# EAGLE board Layout_SMD (EAGLE 7.2.0)
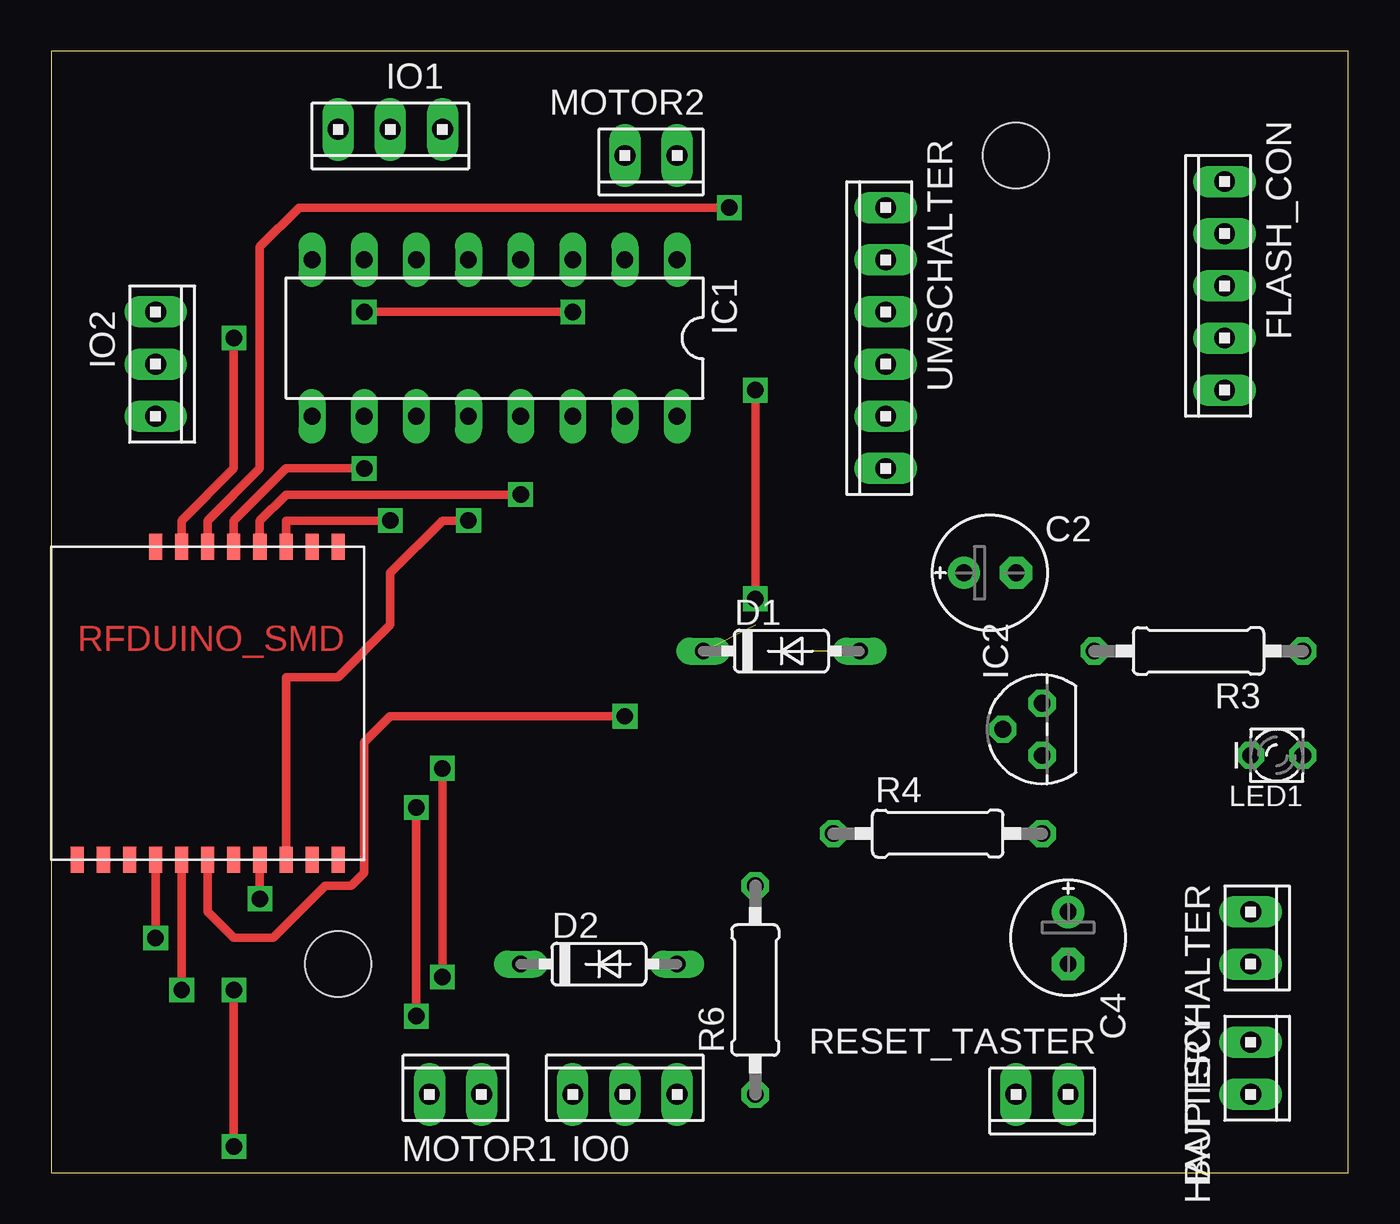
[diagram p0: board, top side]
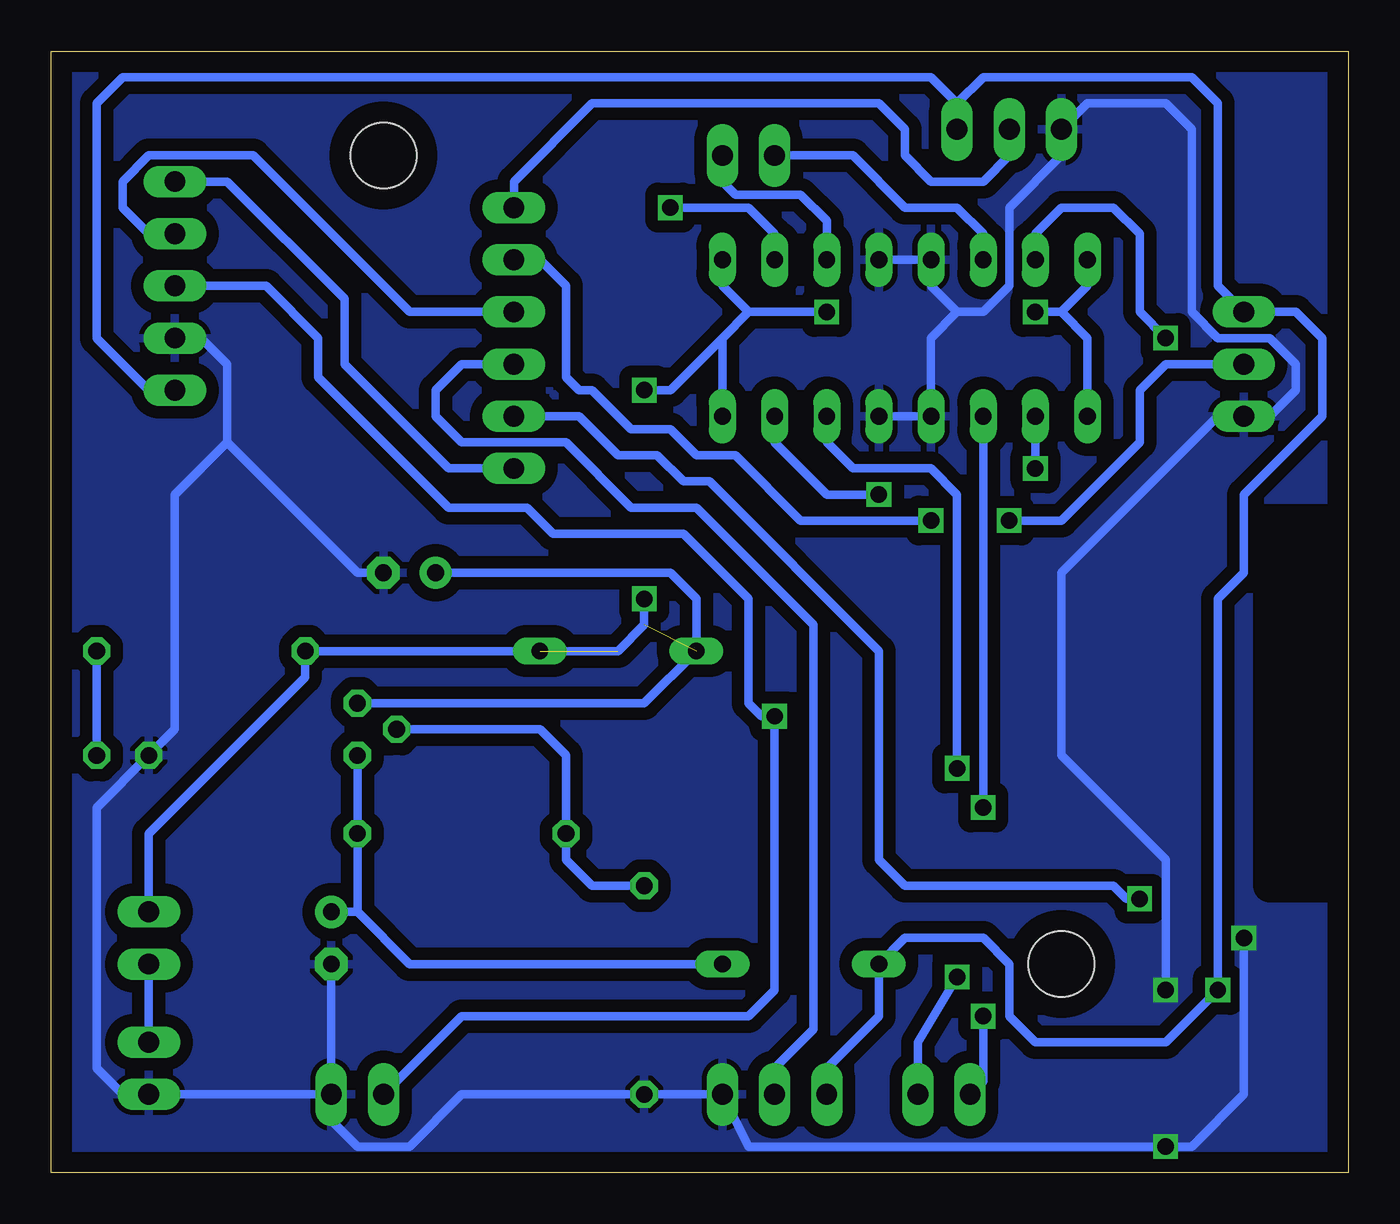
[diagram p1: board, bottom side, seen from below]

Size 63.17 x 54.6 mm. Coordinates in mm from the lower left corner, seen from the top.
Outline: 0,0 63.17,0 63.17,54.6 0,54.6 0,0
Copper layers (1*16): Top 0.035mm / dielectric 1.5mm / Bottom 0.035mm
Design rules "default": minimum track width 10mil, minimum drill 24mil, track to track 8mil, track to pad 8mil, pad to pad 8mil, via to via 8mil, smd to smd 8mil, copper to edge 40mil, drill to drill 8mil, minimum pad ring 10mil, minimum via ring 8mil, stop-mask expansion 4mil, vias tented up to drill 0mil, thermal gap 10mil
Holes 3.2 mm at 13.97,10.16 46.99,49.53
tRestrict: area 0,16.5 to 3.8,30.5
bRestrict: area 0,14 to 3.8,31.8

## Footprints (pad centres in the part's own frame; a part is rotated, then mirrored left to right if it is on the bottom)
10X02MTA = drill 1.016 long: 1 1.27,0; 2 -1.27,0
E2,5-6E = drill 0.813 pad 1.575: + -1.27,0 | drill 0.813 pad 1.575 octagon: - 1.27,0
DIODE_DO35-7 = drill 0.813 long: A 3.81,0; C -3.81,0
10X05MTA = drill 1.016 long: 1 5.08,0; 2 2.54,0; 3 0,0; 4 -2.54,0; 5 -5.08,0
DIL16 = drill 0.813 long: 1 -8.89,-3.81; 2 -6.35,-3.81; 3 -3.81,-3.81; 4 -1.27,-3.81; 5 1.27,-3.81; 6 3.81,-3.81; 7 6.35,-3.81; 8 8.89,-3.81; 9 8.89,3.81; 10 6.35,3.81; 11 3.81,3.81; 12 1.27,3.81; 13 -1.27,3.81; 14 -3.81,3.81; 15 -6.35,3.81; 16 -8.89,3.81
TO92 = drill 0.813 octagon: 1 -1.27,0; 2 0,1.905; 3 1.27,0
10X03MTA = drill 1.016 long: 1 2.54,0; 2 0,0; 3 -2.54,0
LED_LD260 = drill 0.813 octagon: A -1.27,0; K 1.27,0
0207/10 = drill 0.813 octagon: 1 -5.08,0; 2 5.08,0
RFDUINO_SMD = smd 1.27 x 0.635: +3V 15.24,6.35; EXT.ANT 15.24,3.81; FACTORY 15.24,8.89; GND 15.24,5.08; GND1 0,13.97; GND2 0,12.7; GND8 0,5.08; GND9 15.24,1.27; GND10 15.24,2.54; GND18 15.24,12.7; GND19 15.24,13.97; IO0/TX 15.24,10.16; IO1/RX 15.24,11.43; IO2 0,11.43; IO3 0,10.16; IO4 0,8.89; IO5 0,7.62; IO6 0,6.35; RESET 15.24,7.62
10X06MTA = drill 1.016 long: 1 6.35,0; 2 3.81,0; 3 1.27,0; 4 -1.27,0; 5 -3.81,0; 6 -6.35,0

## Placement (x,y rotation side)
BATTERY  [10X02MTA]  58.42,5.08 270 top
C2  1µF  [E2,5-6E]  45.72,29.21 0 top
C4  22µF  [E2,5-6E]  49.53,11.43 270 top
D1  [DIODE_DO35-7]  35.56,25.4 0 top
D2  [DIODE_DO35-7]  26.67,10.16 0 top
FLASH_CON  [10X05MTA]  57.15,43.18 90 top
HAUPTSCHALTER  [10X02MTA]  58.42,11.43 270 top
IC1  L293D  [DIL16]  21.59,40.64 180 top
IC2  LP2950Z  [TO92]  48.26,21.59 90 top
IO0  [10X03MTA]  27.94,3.81 0 top
IO1  [10X03MTA]  16.51,50.8 180 top
IO2  [10X03MTA]  5.08,39.37 270 top
LED1  [LED_LD260]  59.69,20.32 180 top
MOTOR1  [10X02MTA]  19.68,3.81 0 top
MOTOR2  [10X02MTA]  29.21,49.53 180 top
R3  1k  [0207/10]  55.88,25.4 180 top
R4  120  [0207/10]  43.18,16.51 0 top
R6  12  [0207/10]  34.29,8.89 90 top
RESET_TASTER  [10X02MTA]  48.26,3.81 180 top
U$1  SMD_RFDUINO  [RFDUINO_SMD]  0,30.48 270 top
UMSCHALTER  [10X06MTA]  40.64,40.64 90 top

## Library data of the parts
BATTERY FLASH_CON HAUPTSCHALTER IO0 IO1 IO2 MOTOR1 MOTOR2 RESET_TASTER UMSCHALTER = con-amp
C2 C4 R4 R6 = rcl
D1 D2 LED1 = eagle-ltspice; SPICEMODEL: NONE; SPICEPREFIX: D; SPICETYPE: diode
IC1 = st-microelectronics; MPN: L293D; OC_FARNELL: 9589619; OC_NEWARK: 56P8249
IC2 = linear
R3 = resistor
U$1 = RFDuino_SMD

## Nets
5V: C2.+ D1.A HAUPTSCHALTER.2 IC1.1 IC1.8 IC1.9 IC1.16 R3.2
+3V: D2.C FLASH_CON.5 IO0.3 IO1.3 IO2.3 U$1.+3V
+5V: BATTERY.2 HAUPTSCHALTER.1
GND: BATTERY.1 C2.- C4.- FLASH_CON.4 IC1.4 IC1.5 IC1.12 IC1.13 IO0.1 IO1.1 IO2.1 LED1.K R6.1 RESET_TASTER.2 U$1.GND
GPIO3: IC1.15 U$1.IO3
GPIO4: IC1.10 U$1.IO4
GPIO5: IC1.2 U$1.IO5
GPIO6: IC1.7 U$1.IO6
IO0: IO0.2 UMSCHALTER.4
IO0/TX: U$1.IO0/TX UMSCHALTER.5
IO1: IO1.2 UMSCHALTER.1
IO1/RX: U$1.IO1/RX UMSCHALTER.2
N$1: D1.C IC2.3
N$5: LED1.A R3.1
N$7: IC1.6 MOTOR2.1
N$9: IC1.3 MOTOR2.2
N$10: IC2.2 R4.1 R6.2
N$11: IC1.11 MOTOR1.2
N$12: IC1.14 MOTOR1.1
N$15: FLASH_CON.3 RESET_TASTER.1 U$1.RESET
N$17: C4.+ D2.A IC2.1 R4.2
N$20: IO2.2 U$1.IO2
RX: FLASH_CON.2 UMSCHALTER.3
TX: FLASH_CON.1 UMSCHALTER.6

## Tracks (layer width: path | path; a pad name or v marks a point on that pad's centre or on a via)
5V  (via drill 0.6, 0.8)  (2 unrouted)
  Top 0.406: v15.24,41.91 v25.4,41.91 | v34.29,27.94 v34.29,38.1
  Bottom 0.406: IC1.8 12.7,43.18 13.97,41.91 | 13.97,41.91 v15.24,41.91 | IC1.9 12.7,40.64 13.97,41.91 | v25.4,41.91 29.21,41.91 | 29.21,41.91 30.48,43.18 IC1.1 | IC1.16 30.48,40.64 | 30.48,40.64 29.21,41.91 | HAUPTSCHALTER.2 58.42,16.51 50.8,24.13 R3.2 35.56,25.4 34.29,26.67 v34.29,27.94 | v34.29,38.1 33.02,38.1 30.48,40.64 | C2.+ 33.02,29.21 31.75,27.94 31.75,25.4
+3V  (via drill 0.8)
  Top 0.406: v6.35,8.89 U$1.+3V
  Bottom 0.406: IO1.3 19.05,52.07 | 19.05,52.07 17.78,53.34 7.62,53.34 6.35,52.07 6.35,43.18 IO2.3 2.54,41.91 1.27,40.64 1.27,36.83 5.08,33.02 5.08,29.21 6.35,27.94 v6.35,8.89 8.89,6.35 15.24,6.35 16.51,7.62 16.51,10.16 17.78,11.43 21.59,11.43 D2.C 22.86,7.62 25.4,5.08 IO0.3 | 19.05,52.07 20.32,53.34 59.69,53.34 60.96,52.07 60.96,40.64 58.42,38.1 FLASH_CON.5
+5V
  Bottom 0.406: BATTERY.2 HAUPTSCHALTER.1
GND  (via drill 0.6, 0.8)
  Top 0.406: v5.08,11.43 U$1.GND | v8.89,1.27 v8.89,8.89
  Bottom 0.406: FLASH_CON.4 55.88,40.64 54.61,39.37 54.61,35.56 | RESET_TASTER.2 BATTERY.1 59.69,3.81 60.96,5.08 60.96,17.78 LED1.K 57.15,21.59 57.15,33.02 54.61,35.56 | RESET_TASTER.2 49.53,2.54 48.26,1.27 45.72,1.27 43.18,3.81 R6.1 IO0.1 29.21,1.27 v8.89,1.27 7.62,1.27 5.08,3.81 v5.08,11.43 | IC1.4 IC1.5 20.32,43.18 19.05,41.91 | IC1.13 IC1.12 20.32,40.64 19.05,41.91 | 19.05,41.91 17.78,41.91 16.51,43.18 16.51,46.99 13.97,49.53 IO1.1 12.7,52.07 8.89,52.07 7.62,50.8 7.62,41.91 6.35,40.64 3.81,40.64 2.54,39.37 2.54,38.1 3.81,36.83 IO2.1 6.35,36.83 13.97,29.21 13.97,20.32 8.89,15.24 v8.89,8.89 | C4.- RESET_TASTER.2 | C2.- 48.26,29.21 54.61,35.56
  pour Bottom (isolate 0.61): 0,54.61 63.5,54.61 63.5,0 0,0
GPIO3  (via drill 0.8)
  Top 0.406: U$1.IO3 10.16,31.75 11.43,33.02 v22.86,33.02
  Bottom 0.406: IC1.15 27.94,35.56 25.4,33.02 v22.86,33.02
GPIO4  (via drill 0.8)
  Top 0.406: v15.24,34.29 11.43,34.29 8.89,31.75 U$1.IO4
  Bottom 0.406: v15.24,34.29 IC1.10
GPIO5  (via drill 0.8)
  Top 0.406: v33.02,46.99 12.06,46.99 10.16,45.09 10.16,34.29 7.62,31.75 U$1.IO5
  Bottom 0.406: v33.02,46.99 29.21,46.99 27.94,45.72 IC1.2
GPIO6  (via drill 0.8)
  Top 0.406: U$1.IO6 6.35,31.75 8.89,34.29 v8.89,40.64
  Bottom 0.406: v8.89,40.64 10.16,41.91 10.16,45.72 11.43,46.99 13.97,46.99 15.24,45.72 IC1.7
IO0
  Bottom 0.406: IO0.2 27.94,5.08 26.04,6.98 26.04,26.67 31.75,32.38 34.92,32.38 38.1,35.56 43.18,35.56 44.45,36.83 44.45,38.1 43.18,39.37 UMSCHALTER.4
IO0/TX  (via drill 0.8)
  Top 0.406: v10.16,13.34 U$1.IO0/TX
  Bottom 0.406: UMSCHALTER.5 37.47,36.83 35.56,34.93 33.66,34.93 32.38,33.66 31.11,33.66 22.86,25.4 22.86,15.24 21.59,13.97 11.43,13.97 10.79,13.34 v10.16,13.34
IO1
  Bottom 0.406: UMSCHALTER.1 40.64,48.26 36.83,52.07 22.86,52.07 21.59,50.8 21.59,49.53 20.32,48.26 17.78,48.26 16.51,49.53 IO1.2
IO1/RX  (via drill 0.8)
  Top 0.406: U$1.IO1/RX 11.43,24.13 13.97,24.13 16.51,26.67 16.51,29.21 19.05,31.75 v20.32,31.75
  Bottom 0.406: UMSCHALTER.2 39.37,44.45 38.1,43.18 38.1,38.73 37.47,38.1 36.83,38.1 34.92,36.2 33.02,36.2 31.75,34.93 29.84,34.93 26.67,31.75 v20.32,31.75
N$1
  Bottom 0.406: IC2.3 34.29,22.86 D1.C
N$5
  Bottom 0.406: R3.1 LED1.A
N$7
  Bottom 0.406: MOTOR2.1 24.13,49.53 21.59,46.99 19.05,46.99 17.78,45.72 IC1.6
N$8
  pour Bottom (isolate 0.61): 0,54.61 63.5,54.61 63.5,0 0,0
N$9
  Bottom 0.406: IC1.3 25.4,46.35 26.67,47.62 29.84,47.62 30.48,48.26 MOTOR2.2
N$10
  Bottom 0.406: R6.2 36.83,13.97 38.1,15.24 R4.1 38.1,20.32 39.37,21.59 IC2.2
N$11  (via drill 0.8)
  Top 0.406: v17.78,7.62 v17.78,17.78
  Bottom 0.406: v17.78,17.78 IC1.11 | v17.78,7.62 17.78,4.45 MOTOR1.2
N$12  (via drill 0.8)
  Top 0.406: v19.05,9.52 v19.05,19.69
  Bottom 0.406: v19.05,19.69 19.05,33.02 20.32,34.29 24.13,34.29 25.4,35.56 IC1.14 | MOTOR1.1 20.95,6.35 v19.05,9.52
N$15  (via drill 0.8)
  Top 0.406: U$1.RESET 7.62,12.7 8.89,11.43 10.79,11.43 13.34,13.97 14.61,13.97 15.24,14.6 15.24,20.95 16.51,22.23 v27.94,22.23
  Bottom 0.406: FLASH_CON.3 52.7,43.18 50.16,40.64 50.16,38.73 43.81,32.38 40.01,32.38 38.73,31.12 32.38,31.12 29.21,27.94 29.21,22.86 28.57,22.23 v27.94,22.23 27.94,8.89 29.21,7.62 43.18,7.62 RESET_TASTER.1
N$17
  Bottom 0.406: 48.26,12.7 R4.2 IC2.1 | 48.26,12.7 45.72,10.16 D2.A | C4.+ 48.26,12.7
N$20  (via drill 0.8)
  Top 0.406: U$1.IO2 11.43,31.75 v16.51,31.75
  Bottom 0.406: IO2.2 8.89,39.37 10.16,38.1 10.16,35.56 13.97,31.75 v16.51,31.75
RX
  Bottom 0.406: FLASH_CON.2 58.42,45.72 59.69,46.99 59.69,48.26 58.42,49.53 53.34,49.53 45.72,41.91 UMSCHALTER.3
TX
  Bottom 0.406: FLASH_CON.1 54.61,48.26 48.9,42.54 48.9,39.37 43.81,34.29 UMSCHALTER.6